# Allegro board Voltmeter.brd
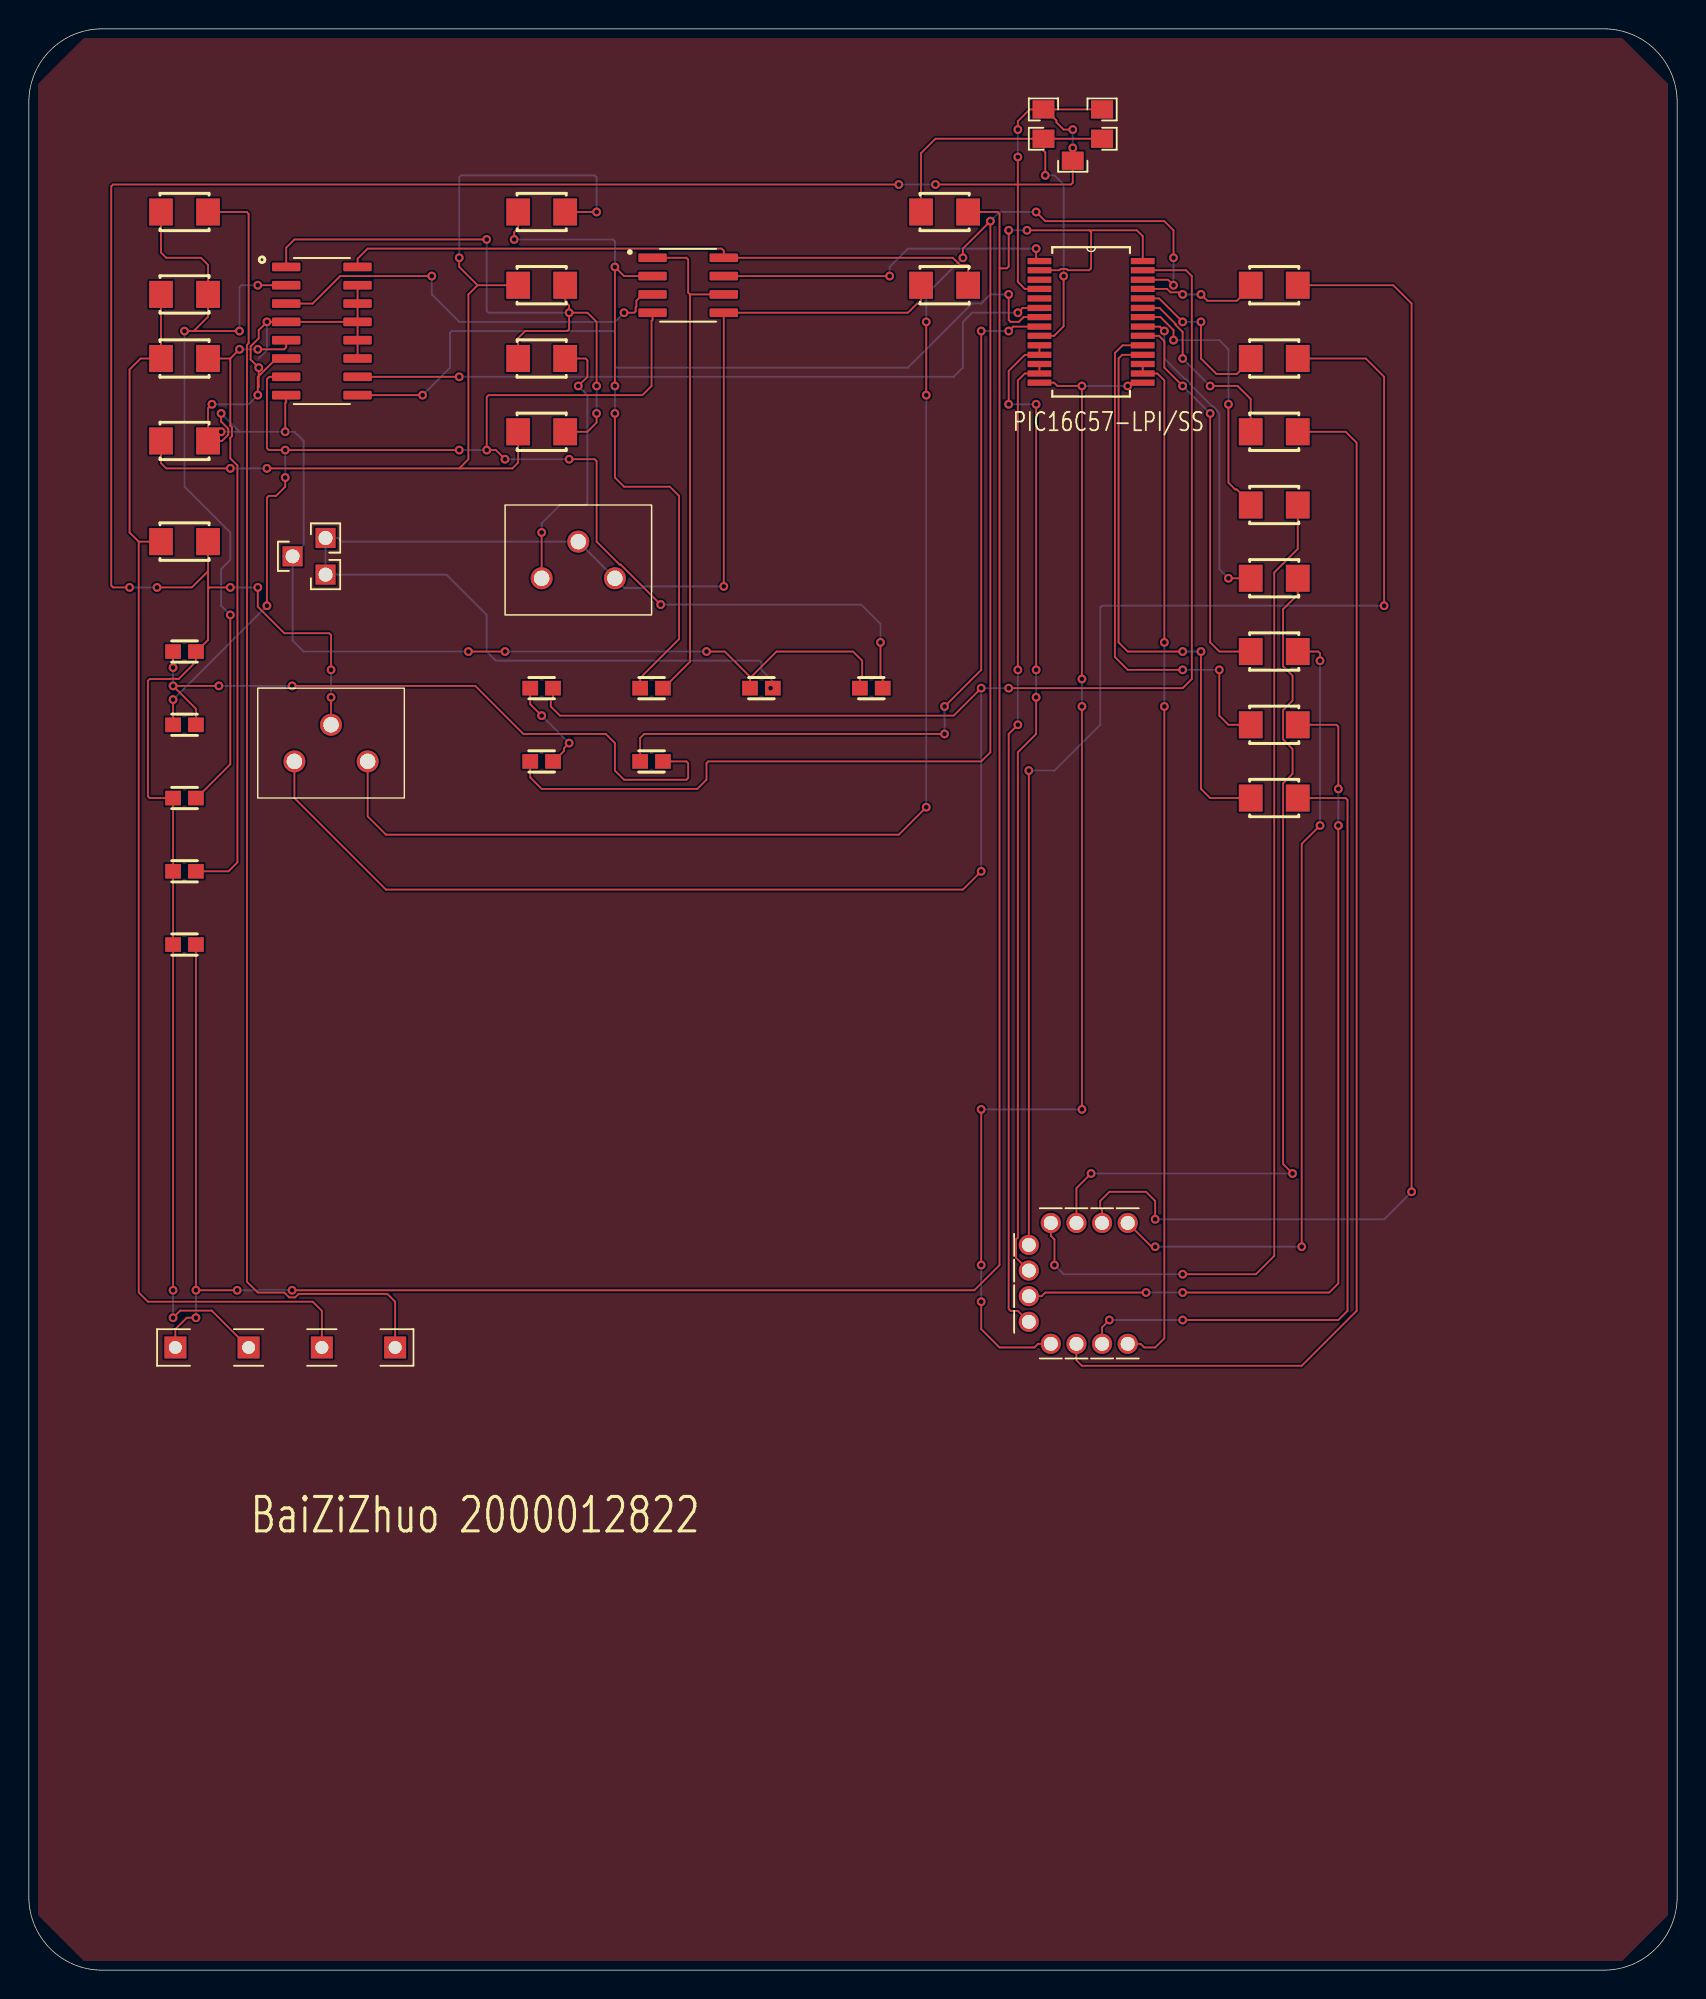
[diagram p0: board, top side]
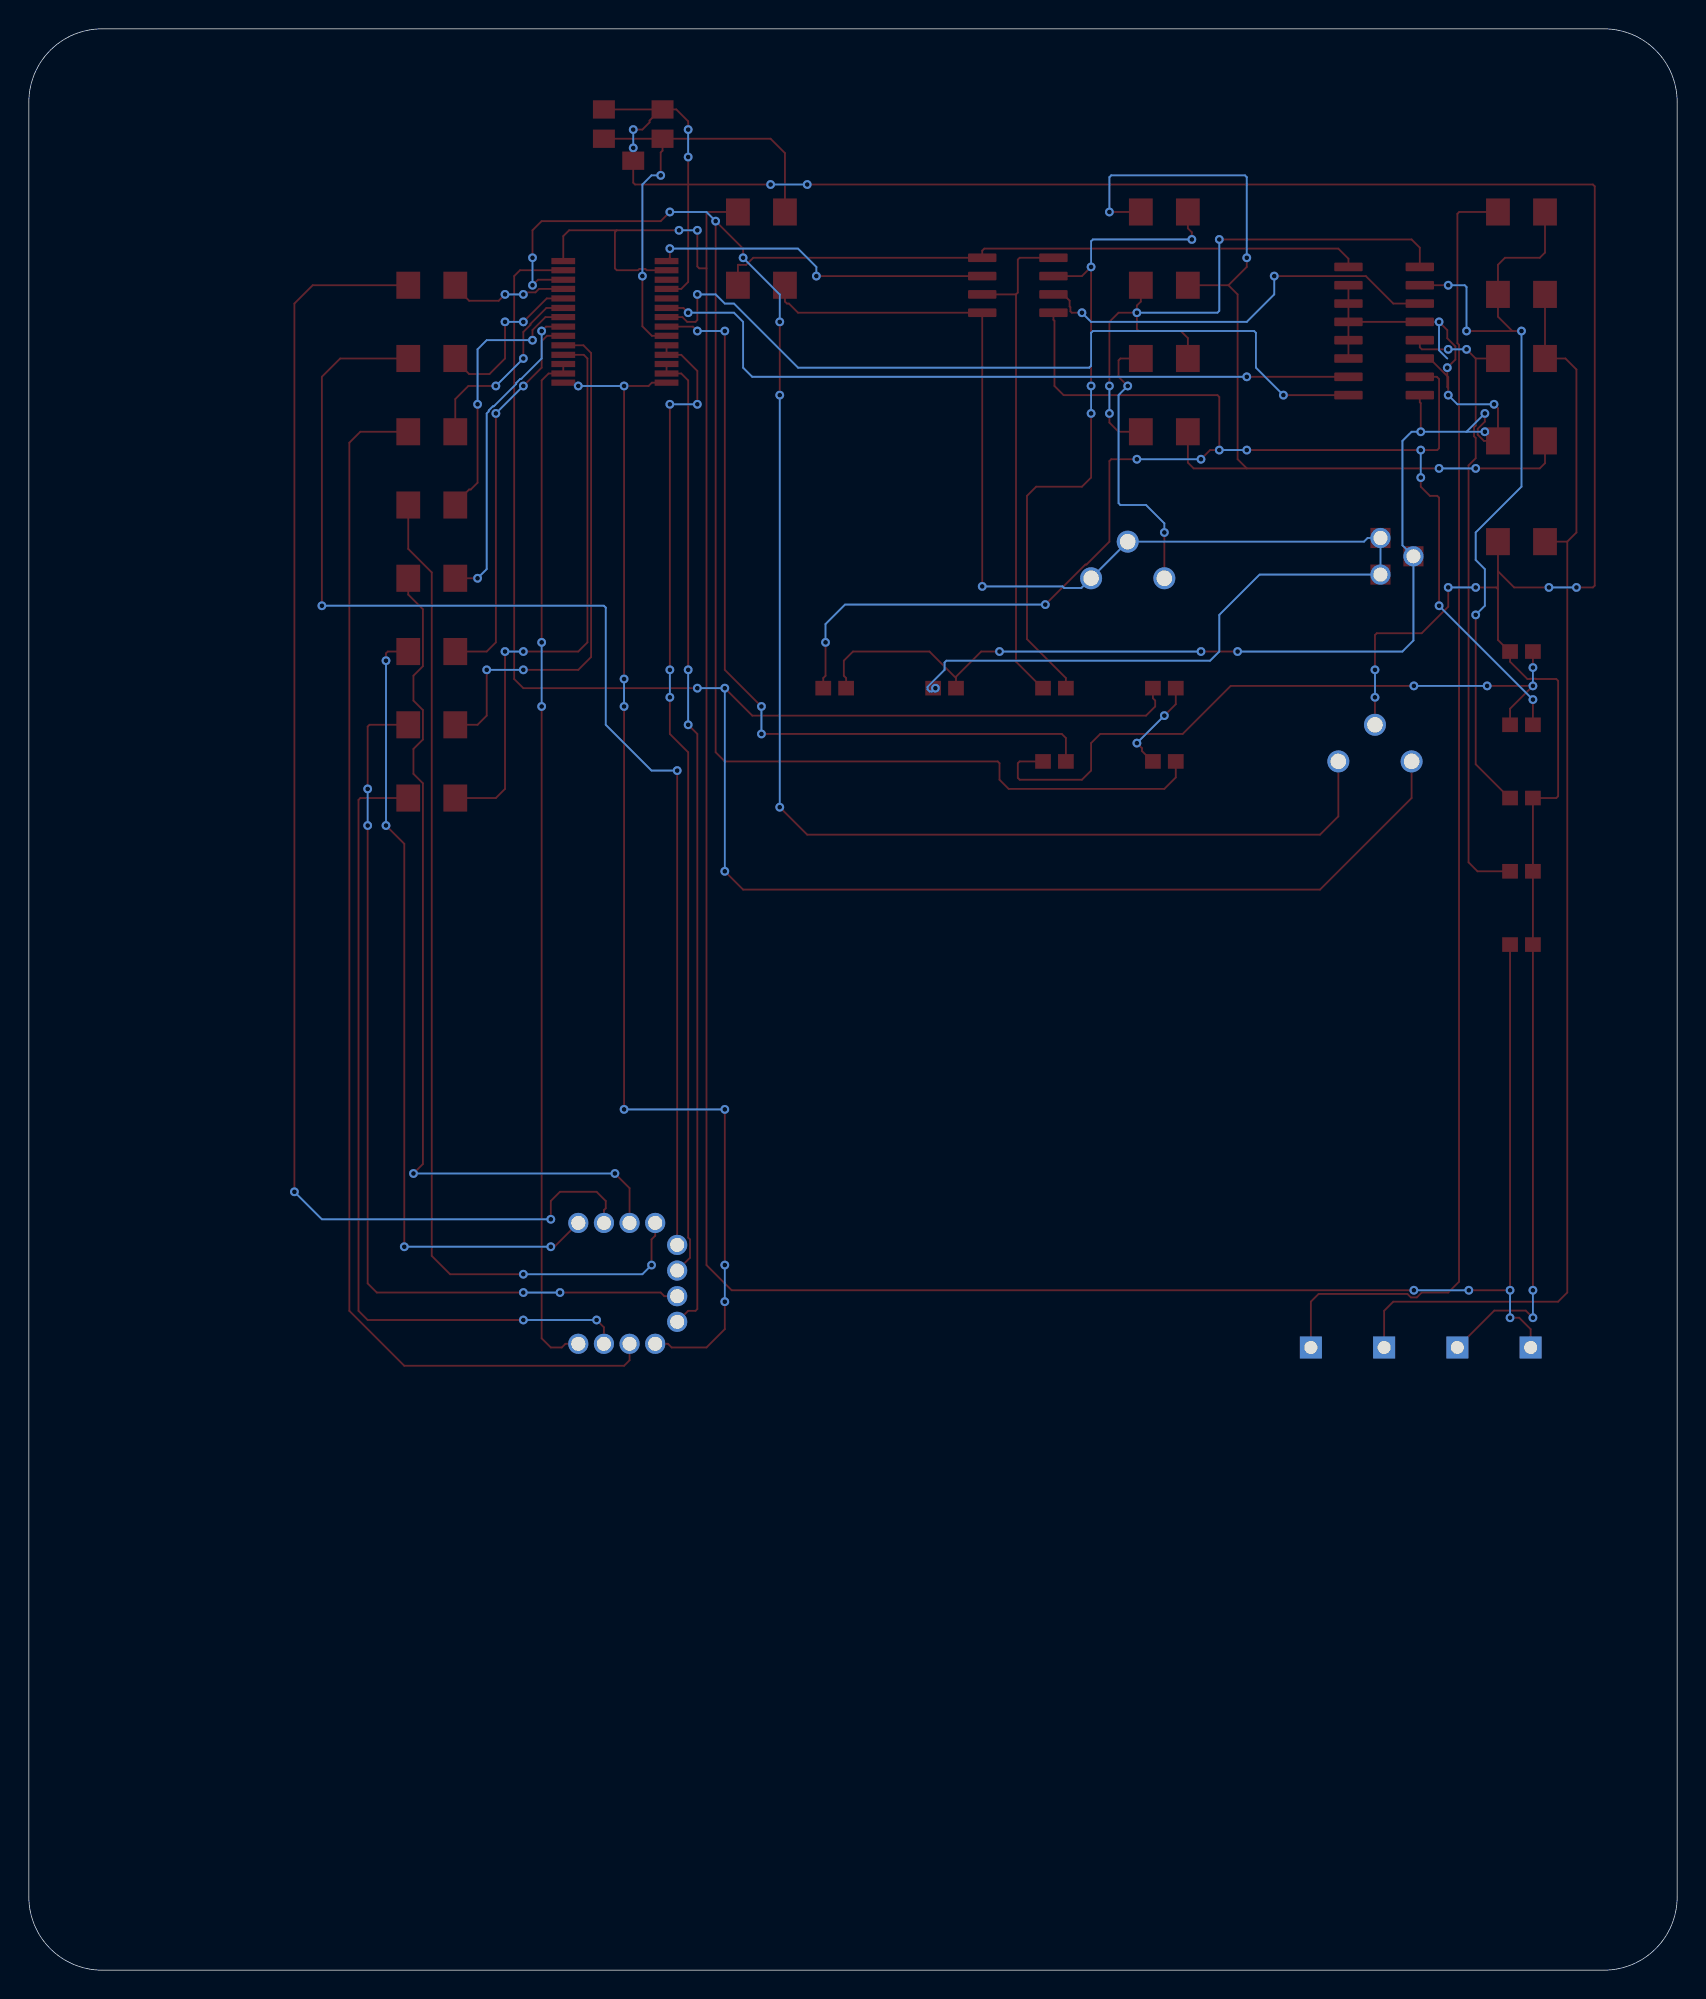
[diagram p1: board, bottom side, seen from below]

Outline 114.3 x 134.62 mm; copper layers: TOP, BOTTOM. Coordinates in mm from the lower left corner of the outline.
Outline path: 0,129.54 0,5.08 arc(1.49,1.49) 5.08,0 109.22,0 arc(112.81,1.49) 114.3,5.08 114.3,129.54 arc(112.81,133.13) 109.22,134.62 5.08,134.62 arc(1.49,133.13) 0,129.54

## Design rules (mm)
constraint set DEFAULT: min track width 0.127

## Placement (name value [footprint] x y rotation side)
C1  4.7uF  [ZS_C0603]  43.18 83.82 0 top
C2  4.7uF  [ZS_C0603]  58.42 88.9 0 top
C3  1uF  [ZS_C0603]  50.8 88.9 0 top
C4  100n/100V  [ZS_C0603]  43.18 88.9 0 top
C5  22p  [ZS_C0603]  35.56 83.82 0 top
C6  22p  [ZS_C0603]  35.56 88.9 0 top
C7  100n  [ZS_C0603]  10.8 71.12 0 top
C8  100n  [ZS_C0603]  10.8 76.2 0 top
C9  100n  [ZS_C0603]  10.8 81.28 0 top
D1  1N4148  [ZS_C0603]  10.8 86.36 0 top
D2  1N4148  [ZS_C0603]  10.8 91.44 0 top
DS1  LG5641AH  [DS1]  66.04 40.64 0 top
J1  Pow_and_Vin  [J1]  -297.18 -208.28 0 top
R1  1k  [ZS_R1206]  63.5 116.84 0 top
R2  220  [ZS_R1206]  86.36 81.28 0 top
R3  220  [ZS_R1206]  86.36 86.36 0 top
R4  220  [ZS_R1206]  86.36 91.44 0 top
R5  220  [ZS_R1206]  86.36 96.52 0 top
R6  220  [ZS_R1206]  86.36 101.6 0 top
R7  220  [ZS_R1206]  86.36 106.68 0 top
R8  220  [ZS_R1206]  86.36 111.76 0 top
R9  220  [ZS_R1206]  86.36 116.84 0 top
R10  100  [POT]  35.56 96.52 0 top
R11  5.1k  [ZS_R1206]  35.56 106.68 0 top
R12  2.7k  [ZS_R1206]  35.56 111.76 0 top
R13  30k  [ZS_R1206]  35.56 121.92 0 top
R14  300  [ZS_R1206]  35.56 116.84 0 top
R15  300  [ZS_R1206]  10.8 106.04 0 top
R16  10k  [ZS_R1206]  10.8 111.76 0 top
R17  100k  [ZS_R1206]  10.8 121.92 0 top
R18  0ohm  [ZS_R1206]  10.8 99.06 0 top
R19  10k  [ZS_R1206]  63.5 121.92 0 top
R20  11k  [ZS_R1206]  10.8 116.21 0 top
S1  Stop/Run  [SW]  63.5 119.38 0 top
U1  TL431  [U1]  12.7 91.44 0 top
U2  TL062  [SOIC127P599X175-8N]  45.72 116.84 0 top
U3  PIC16C57  [SOP65P785X198-28N]  73.66 114.3 0 top
U4  CD4052B  [SOIC127P600X175-16N]  20.32 113.66 0 top
Y1  16MHz  [POT]  18.41 83.82 0 top

## Library data of the parts
C1-C9 = C
D1 D2 = D1N4148
DS1 = LG5641AH
J1 = INPUT
R1-R9 R11-R20 = R
R10 = POT: User Part Number: ***
S1 = Switch Pushbutton TH
U1 = TL431
U2 = TL062
U3 = PIC16C57
U4 = CD4052B/SO
Y1 = XTAL16M: User Part Number: ***

## Footprints (pads in the part's own frame, mm; a bottom-side part is the same pattern mirrored in y, then rotated)
DS1
  round 1.397 hole 0.965: 1(4.826,11.176) 2(6.604,11.176) 3(8.382,11.176) 4(10.16,11.176) 5(3.302,9.652) 6(3.302,7.874) 7(3.302,6.096) 8(3.302,4.318) 9(4.826,2.794) 10(6.604,2.794) 11(8.382,2.794) 12(10.16,2.794)
J1
  rect 1.524x1.524 hole 0.889: 1(307.34,251.46) 2(312.42,251.46) 3(317.5,251.46) 4(322.58,251.46)
POT
  round 1.524 hole 1.067: 1(0,0) 2(5.08,0) 3(2.54,2.54)
SOIC127P599X175-8N
  custom 1.971x0.599 smd: 1(-2.469,1.905) 2(-2.469,0.635) 3(-2.469,-0.635) 4(-2.469,-1.905) 5(2.469,-1.905) 6(2.469,-0.635) 7(2.469,0.635) 8(2.469,1.905)
SOIC127P600X175-16N
  custom 1.971x0.599 smd: 1(-2.474,4.445) 2(-2.474,3.175) 3(-2.474,1.905) 4(-2.474,0.635) 5(-2.474,-0.635) 6(-2.474,-1.905) 7(-2.474,-3.175) 8(-2.474,-4.445) 9(2.474,-4.445) 10(2.474,-3.175) 11(2.474,-1.905) 12(2.474,-0.635) 13(2.474,0.635) 14(2.474,1.905) 15(2.474,3.175) 16(2.474,4.445)
SOP65P785X198-28N
  rect 1.651x0.432 smd: 1(-3.581,4.216) 2(-3.581,3.581) 3(-3.581,2.921) 4(-3.581,2.286) 5(-3.581,1.626) 6(-3.581,0.965) 7(-3.581,0.33) 8(-3.581,-0.33) 9(-3.581,-0.965) 10(-3.581,-1.626) 11(-3.581,-2.286) 12(-3.581,-2.921) 13(-3.581,-3.581) 14(-3.581,-4.216) 15(3.581,-4.216) 16(3.581,-3.581) 17(3.581,-2.921) 18(3.581,-2.286) 19(3.581,-1.626) 20(3.581,-0.965) 21(3.581,-0.33) 22(3.581,0.33) 23(3.581,0.965) 24(3.581,1.626) 25(3.581,2.286) 26(3.581,2.921) 27(3.581,3.581) 28(3.581,4.216)
SW
  rect 1.524x1.27 smd: 1A(6.858,9.652) 1B(6.858,7.62) 2A(10.922,9.652) 2B(10.922,7.62) 3(8.89,6.096)
U1
  rect 1.397x1.397 hole 0.965: 1(7.874,7.874) 6(5.588,6.604) 8(7.874,5.334)
ZS_C0603
  rect 1.092x1.016 smd: 1(-0.792,0) 2(0.792,0)
ZS_R1206
  rect 1.651x1.88 smd: 1(-1.631,0) 2(1.631,0)

## Nets
AGND: C2.1 C3.1 R15.2 U1.6 U4.4(Y3) U4.6 U4.8 U4.11 U4.12 U4.13 U4.14 U4.15
GND: C7.1 C8.1 C9.1 D2.2 J1.2 R18.2 S1.1A S1.2A S1.3(VSS) U3.4 Y1.3(GND)
GND_SIGNAL: J1.3 R16.1 R18.1 R20.1
BIT0: DS1.6 U3.10 U3.11
BIT1: DS1.8 U3.12 U3.13
BIT2: DS1.9 U3.14 U3.15
BIT3: DS1.12 U3.16 U3.17
LED_A: R2.1 U3.18
LED_B: R3.1 U3.19
LED_C: R4.1 U3.20
LED_D: R5.1 U3.21
LED_DP: R9.1 U3.25
LED_E: R6.1 U3.22
LED_F: R7.1 U3.23
LED_G: R8.1 U3.24
OSC_VEE: C1.1 U3.8
SET0: U3.6 U4.10
SET1: U3.7 U4.9
STOP/RUN: R19.1 S1.1B S1.2B U3.9
T0: U2.7(OUT) U3.1
V+5V: C7.2 J1.1 R19.2 U3.2(VDD) U3.28
V+5VA: R1.2 U2.8 U4.16
V-3VA: C2.2 D1.1 U2.4 U4.7
VREF(+2.5V): C3.2 R1.1 R10.2(WIPER) R10.3 U1.1 U1.8(REF) U2.5
Y: U2.3 U4.3
Y0: R11.2 R12.1 R14.2 U4.1
Y1: C8.2 R16.2 U4.5
Y2: C9.2 R17.1 R20.2 U4.2
N10956272: C4.2 U2.1 U2.6
N10956330: C4.1 R13.1 U2.2
N10959149: C1.2 D1.2 D2.1
N10973551: C6.2 U3.27 Y1.1
N10973559: C5.1 U3.26 Y1.2
N10978471: R11.1 R13.2 R14.1 R15.1
N10980547: DS1.11 R2.2
N10980595: DS1.7 R3.2
N10980645: DS1.4 R4.2
N10980695: DS1.2 R5.2
N10980745: DS1.1 R6.2
N10980795: DS1.10(G) R7.2
N10980845: DS1.5 R8.2
N10980895: DS1.3 R9.2
N12685725: J1.4(VIN) R17.2
N109570060: R10.1 R12.2
N109735831: C5.2 C6.1

Pads without a net: U3 3 5

## Via types
v1: diameter 0.61, hole 0.33, TOP to BOTTOM, 143 vias

## Routing (per net, layer and track width the routed paths; a pad name or vN(x,y) marks a point on that pad's centre or on a via; arc(x,y) is an arc through that point)
AGND: length 101.7
  TOP w0.127: U4.13 U4.12 U4.11 ; U4.13 U4.4 v1(16.51,114.3) 15.94,113.73 15.94,113.16 15.38,112.6 15.38,111.69 v1(15.94,111.13) 15.94,109.78 15.88,109.72 ; U4.13 U4.14 U4.15 ; U4.6 17.16,111.76 15.88,110.47 15.88,109.72 ; v1(46.99,91.44) 48.26,91.44 50.01,89.69 50.01,89.6 ; v1(17.78,106.68) 17.78,108.66 17.85,108.73 U4.8 ; v1(13.33,107.95) 13.33,107.38 13.83,106.89 13.83,106.47 13.4,106.04 R15.2 ; v1(12.7,108.59) 12.43,108.31 12.43,106.68 v1(13.33,106.68) ; 50.01,89.6 C3.1 ; 50.01,89.6 51.85,91.44 57.15,91.44 57.78,90.81 57.78,89.76 57.63,89.6 C2.1 ; 15.88,109.72 v1(15.88,109.22) ; v1(33.02,91.44) v1(30.48,91.44)
  BOTTOM w0.127: v1(12.7,108.59) 15.24,108.59 v1(15.88,109.22) ; 14.6,106.68 v1(17.78,106.68) 18.41,106.68 19.05,106.04 19.05,98.81 U1.6 18.29,92.2 19.05,91.44 v1(30.48,91.44) ; 14.6,106.68 v1(13.33,106.68) ; 14.6,106.68 v1(13.33,107.95) ; 15.94,111.76 16.51,112.33 v1(16.51,114.3) ; v1(46.99,91.44) v1(33.02,91.44)
GND: length 208.8
  TOP w0.127: v1(62.87,123.83) 72.26,123.83 72.39,123.95 S1.3 v1(72.39,126.37) ; v1(10,47.15) C7.1 C8.1 C9.1 8.38,81.28 8.25,81.41 8.25,89.41 8.38,89.53 9.78,89.53 9.8,89.55 10.21,89.55 10.23,89.53 10.38,89.53 11.59,90.74 D2.2 11.63,91.44 12.43,92.24 12.43,95.76 ; 70.49,129.03 S1.2A ; 70.49,129.03 71.26,128.26 71.26,128.13 71.75,127.64 v1(72.39,127.64) ; 70.49,129.03 S1.1A 69.4,129.03 68.58,128.21 v1(68.58,127.64) ; v1(13.97,95.89) 12.55,95.89 12.43,95.76 ; v1(6.99,95.89) 5.84,95.89 5.71,96.01 5.71,123.7 5.84,123.83 v1(60.32,123.83) ; 12.43,97.01 11.3,95.89 v1(8.89,95.89) ; 12.43,97.01 R18.2 ; 12.43,97.01 12.43,95.76 ; v1(10,45.24) 10.5,45.74 12.68,45.74 J1.2 ; v1(20.95,90.17) 20.95,92.58 20.83,92.71 17.71,92.71 15.88,94.55 v1(15.88,95.89) ; Y1.3 v1(20.95,88.27) ; v1(68.58,125.73) 68.58,117.07 69.06,116.59 U3.4
  BOTTOM w0.127: v1(15.88,95.89) v1(13.97,95.89) ; v1(62.87,123.83) v1(60.32,123.83) ; v1(10,47.15) v1(10,45.24) ; v1(68.58,127.64) v1(68.58,125.73) ; v1(72.39,126.37) v1(72.39,127.64) ; v1(20.95,88.27) v1(20.95,90.17) ; v1(6.99,95.89) v1(8.89,95.89)
GND_SIGNAL: length 88.5
  TOP w0.127: R20.1 R16.1 7.75,111.76 6.99,111 6.99,99.7 7.62,99.06 ; 7.62,99.06 7.62,46.99 8.25,46.35 19.69,46.35 20.32,45.72 J1.3 ; 7.62,99.06 R18.1
BIT0: length 68.5
  TOP w0.127: v1(69.85,88.27) 69.85,85.72 68.58,84.46 68.58,50.8 68.45,50.67 68.45,49.4 DS1.6 ; v1(67.94,108.59) 67.94,110.9 69.06,112.01 U3.11 U3.10 ; v1(69.85,90.17) v1(69.85,108.59)
  BOTTOM w0.127: v1(69.85,108.59) v1(67.94,108.59) ; v1(69.85,88.27) v1(69.85,90.17)
BIT1: length 68.8
  TOP w0.127: v1(68.58,86.36) 67.94,85.72 67.94,45.85 68.07,45.72 68.58,45.72 DS1.8 ; v1(68.58,90.17) 68.58,110.24 69.06,110.72 U3.13 U3.12
  BOTTOM w0.127: v1(68.58,90.17) v1(68.58,86.36)
BIT2: length 85.2
  TOP w0.127: U3.15 76.43,110.08 v1(76.2,109.85) ; v1(66.04,46.35) 66.04,44.45 67.31,43.18 69.72,43.18 69.98,43.43 DS1.9 ; U3.14 71.1,110.08 71.33,109.85 v1(73.02,109.85) v1(73.02,89.53) ; v1(73.02,87.63) v1(73.02,59.69) ; v1(66.04,59.69) v1(66.04,48.9)
  BOTTOM w0.127: v1(73.02,59.69) v1(66.04,59.69) ; v1(76.2,109.85) v1(73.02,109.85) ; v1(66.04,48.9) v1(66.04,46.35) ; v1(73.02,89.53) v1(73.02,87.63)
BIT3: length 71.7
  TOP w0.127: v1(78.74,87.63) 78.74,43.82 78.1,43.18 77.34,43.18 77.09,43.43 DS1.12 ; v1(78.74,92.08) 78.74,110.24 78.26,110.72 U3.16 U3.17
  BOTTOM w0.127: v1(78.74,92.08) v1(78.74,87.63)
LED_A: length 40.7
  TOP w0.127: U3.18 75.82,112.01 75.56,111.76 75.56,92.08 76.2,91.44 v1(80.01,91.44) ; v1(81.28,91.44) 81.28,81.91 81.91,81.28 R2.1
  BOTTOM w0.127: v1(80.01,91.44) v1(81.28,91.44)
LED_B: length 36.5
  TOP w0.127: v1(80.01,90.17) 76.2,90.17 75.31,91.06 75.31,112.14 75.84,112.67 U3.19 ; R3.1 83.19,86.36 82.55,87 v1(82.55,90.17)
  BOTTOM w0.127: v1(80.01,90.17) v1(82.55,90.17)
LED_C: length 26.9
  TOP w0.127: R4.1 82.55,91.44 81.91,92.08 v1(81.91,107.95) ; U3.20 78.37,113.33 78.74,112.96 78.74,111.13 v1(80.01,109.85)
  BOTTOM w0.127: v1(80.01,109.85) v1(81.91,107.95)
LED_D: length 22.2
  TOP w0.127: v1(83.19,96.52) R5.1 ; v1(78.74,113.66) 78.44,113.97 U3.21
  BOTTOM w0.127: v1(83.19,96.52) 82.55,97.16 82.55,107.95 82.41,108.09 82.41,108.16 82.12,108.45 82.05,108.45 80.51,109.99 80.51,110.06 80.22,110.35 80.15,110.35 78.74,111.76 v1(78.74,113.66)
LED_DP: length 8.3
  TOP w0.127: v1(80.01,116.21) 79.87,116.34 79.17,116.34 78.93,116.59 U3.25 ; v1(81.28,116.21) 81.72,115.76 83.77,115.76 84.73,116.73 R9.1
  BOTTOM w0.127: v1(80.01,116.21) v1(81.28,116.21)
LED_E: length 18.8
  TOP w0.127: v1(83.19,108.59) 83.19,103.14 83.65,102.68 83.77,102.68 84.73,101.71 R6.1 ; v1(79.38,113.03) 79.38,113.73 78.48,114.63 U3.22
  BOTTOM w0.127: v1(79.38,113.03) 82.55,113.03 83.19,112.4 v1(83.19,108.59)
LED_F: length 13.5
  TOP w0.127: v1(80.01,111.76) 80.01,113.6 79.51,114.09 79.51,114.16 78.41,115.27 U3.23 ; R7.1 84.73,108.95 83.82,109.85 v1(81.91,109.85)
  BOTTOM w0.127: v1(80.01,111.76) v1(81.91,109.85)
LED_G: length 11.7
  TOP w0.127: v1(81.28,114.3) 81.28,111.76 82.36,110.68 83.77,110.68 84.73,111.65 R8.1 ; U3.24 78.38,115.93 v1(80.01,114.3)
  BOTTOM w0.127: v1(80.01,114.3) v1(81.28,114.3)
OSC_VEE: length 56
  TOP w0.127: v1(66.04,113.66) 66.04,90.17 v1(63.5,87.63) ; v1(67.94,113.66) 68.25,113.97 U3.8 ; v1(63.5,85.72) 42.67,85.72 42.39,85.44 C1.1
  BOTTOM w0.127: v1(63.5,87.63) v1(63.5,85.72) ; v1(67.94,113.66) v1(66.04,113.66)
SET0: length 51.1
  TOP w0.127: v1(68.58,114.94) 68.91,115.27 U3.6 ; U4.10 v1(29.84,110.49)
  BOTTOM w0.127: v1(68.58,114.94) 65.4,114.94 64.77,114.3 64.77,111.13 64.13,110.49 v1(29.84,110.49)
SET1: length 57
  TOP w0.127: v1(27.31,109.22) U4.9 ; v1(67.94,116.21) 67.94,114.43 68.07,114.3 68.65,114.3 68.98,114.63 U3.7
  BOTTOM w0.127: v1(67.94,116.21) 66.68,116.21 66.04,115.57 65.4,115.57 60.96,111.13 40.77,111.13 40.64,111.25 40.64,113.54 40.51,113.66 29.34,113.66 29.21,113.54 29.21,111.13 v1(27.31,109.22)
STOP/RUN: length 33
  TOP w0.127: S1.1B 62.87,127 61.87,126 R19.1 ; S1.1B 70.36,126.17 70.49,126.04 v1(70.49,124.46) ; S1.1B S1.2B ; v1(71.75,117.47) 71.75,113.99 71.1,113.33 U3.9
  BOTTOM w0.127: v1(71.75,117.47) 71.75,123.83 71.12,124.46 v1(70.49,124.46)
T0: length 23.8
  TOP w0.127: U2.7 v1(59.69,117.47) ; v1(69.85,119.38) 69.85,118.75 U3.1
  BOTTOM w0.127: v1(59.69,117.47) 59.69,118.11 60.96,119.38 v1(69.85,119.38)
V+5V: length 181.3
  TOP w0.127: v1(11.59,45.24) 10.95,45.24 10.16,44.45 J1.1 ; U3.2 71.46,117.88 71.55,117.97 71.96,117.97 72.05,117.88 73.53,117.88 73.66,118.01 73.66,120.52 73.53,120.65 ; C7.2 v1(11.59,47.15) v1(14.45,47.15) ; v1(67.94,120.65) 67.94,118.14 67.82,118.01 67.31,118.01 ; 73.53,120.65 76.83,120.65 77.24,120.24 U3.28 ; 73.53,120.65 v1(69.21,120.65) ; 67.31,118.01 67.31,121.79 67.18,121.92 R19.2 ; 67.31,118.01 67.31,48.9 65.56,47.15 v1(18.26,47.15)
  BOTTOM w0.127: v1(11.59,47.15) v1(11.59,45.24) ; v1(14.45,47.15) v1(18.26,47.15) ; v1(67.94,120.65) v1(69.21,120.65)
V+5VA: length 45.4
  TOP w0.127: R1.2 65.13,118.26 64.98,118.26 64.98,118.25 64.56,118.25 64.07,118.75 U2.8 48.19,119.24 48.05,119.38 23.5,119.38 22.79,118.68 U4.16
V-3VA: length 104.7
  TOP w0.127: v1(59.06,92.08) 59.06,89.76 59.21,89.6 C2.2 ; v1(37.46,104.78) 39.24,104.78 39.37,104.65 39.37,99.06 40.96,97.47 41.04,97.47 v1(43.81,94.69) ; v1(33.02,104.78) 32.38,105.41 v1(31.75,105.41) 31.75,109.09 31.88,109.22 42.55,109.22 43.18,109.85 43.18,114.37 43.25,114.44 U2.4 ; D1.1 v1(10,88.11) ; v1(16.51,94.62) 16.51,102.11 16.64,102.23 17.14,102.23 17.78,102.87 v1(17.78,103.51) ; v1(29.84,105.41) v1(17.78,105.41) 16.64,105.41 16.51,105.54 16.51,110.33 16.67,110.49 U4.7
  BOTTOM w0.127: v1(43.81,94.69) 57.71,94.69 59.06,93.34 v1(59.06,92.08) ; v1(17.78,103.51) v1(17.78,105.41) ; v1(33.02,104.78) v1(37.46,104.78) ; v1(10,88.11) v1(16.51,94.62) ; v1(29.84,105.41) v1(31.75,105.41)
VREF(+2.5V): length 103
  TOP w0.127: R1.1 61.87,115.71 61.73,115.57 61.59,115.57 60.96,114.94 U2.5 v1(48.19,95.96)
  BOTTOM w0.127: v1(48.19,95.96) 42.62,95.96 42.5,95.84 41.32,95.84 R10.2 R10.3 21.72,99.06 21.46,99.31 U1.1 U1.8 28.96,96.77 31.75,93.98 31.75,91.44 32.38,90.81 50.67,90.81 50.8,90.68 50.8,90.17 51.98,88.99 51.98,88.81 51.84,88.67 51.66,88.67 v1(51.44,88.9)
Y: length 29.4
  TOP w0.127: v1(27.94,117.47) 21.59,117.47 19.69,115.57 U4.3 ; U2.3 42.57,116.21 42.13,115.77 42.13,115.37 42.08,115.32 42.08,115.03 41.98,114.94 v1(41.27,114.94)
  BOTTOM w0.127: v1(41.27,114.94) 40.64,114.3 29.84,114.3 27.94,116.21 v1(27.94,117.47)
Y0: length 46.2
  TOP w0.127: U4.1 17.85,119.45 18.41,120.02 v1(31.75,120.02) ; v1(37.46,114.94) 37.46,113.79 37.34,113.66 34.42,113.66 33.93,113.18 R12.1 ; v1(37.46,114.94) 37.46,115.43 37.19,115.71 R14.2 ; v1(37.46,114.94) 38.74,114.94 39.37,114.3 v1(39.37,109.85) ; v1(39.37,107.95) 39.37,107.32 38.74,106.68 R11.2
  BOTTOM w0.127: v1(37.46,114.94) 31.88,114.94 31.75,115.06 v1(31.75,120.02) ; v1(39.37,109.85) v1(39.37,107.95)
Y1: length 44.6
  TOP w0.127: 13.97,111.76 13.97,107.11 14.08,106.99 14.08,106.37 13.97,106.25 13.97,104.84 14.47,104.35 14.47,76.82 13.84,76.2 C8.2 ; 13.97,111.76 R16.2 ; 13.97,111.76 v1(14.6,112.4) ; U4.5 17.85,112.54 17.7,112.4 v1(15.88,112.4)
  BOTTOM w0.127: v1(14.6,112.4) v1(15.88,112.4)
Y2: length 56.8
  TOP w0.127: 11.43,113.66 v1(10.8,113.66) ; 11.43,113.66 12.43,114.66 R20.2 12.43,118.26 11.94,118.75 9.52,118.75 9.16,119.11 R17.1 ; 11.43,113.66 v1(14.6,113.66) ; U4.2 v1(15.88,116.84) ; v1(13.97,93.98) 13.97,83.62 11.63,81.28 C9.2
  BOTTOM w0.127: v1(13.97,93.98) 13.33,94.62 13.33,97.16 13.97,97.79 13.97,99.7 10.8,102.87 v1(10.8,113.66) ; v1(15.88,116.84) 14.73,116.84 14.6,116.71 v1(14.6,113.66)
N10956272: length 35.4
  TOP w0.127: 45.85,116.21 45.72,116.33 45.72,118.62 45.59,118.75 U2.1 ; 45.85,116.21 45.85,90.74 44.01,88.9 C4.2 ; 45.85,116.21 U2.6
N10956330: length 47.7
  TOP w0.127: U2.2 41.27,117.47 v1(40.64,118.11) v1(40.64,109.85) ; v1(40.64,107.95) 40.64,103.51 41.27,102.87 44.45,102.87 45.08,102.23 45.08,92.3 42.39,89.6 C4.1 ; v1(33.65,120.02) 33.65,120.51 33.93,120.79 R13.1
  BOTTOM w0.127: v1(40.64,118.11) 40.64,119.89 40.51,120.02 v1(33.65,120.02) ; v1(40.64,109.85) v1(40.64,107.95)
N10959149: length 48.1
  TOP w0.127: C1.2 45.59,83.82 45.72,83.69 45.72,82.68 45.59,82.55 41.27,82.55 40.64,83.19 40.64,85.09 40,85.72 34.29,85.72 30.96,89.06 v1(18.26,89.06) ; D1.2 11.59,87.47 v1(10,89.06) v1(13.18,89.06) ; D2.1 v1(10,90.33)
  BOTTOM w0.127: v1(13.18,89.06) v1(18.26,89.06) ; v1(10,90.33) v1(10,89.06)
N10973551: length 144.6
  TOP w0.127: U3.27 80.24,117.88 80.64,117.47 80.64,89.53 80.01,88.9 v1(67.94,88.9) ; C6.2 36.35,88.2 36.19,88.04 36.19,87.63 36.83,87 64.13,87 v1(66.04,88.9) ; v1(66.04,76.2) 64.77,74.93 24.76,74.93 18.41,81.28 Y1.1
  BOTTOM w0.127: v1(67.94,88.9) v1(66.04,88.9) v1(66.04,76.2)
N10973559: length 177.8
  TOP w0.127: v1(79.38,118.75) 79.38,120.65 78.74,121.28 70.49,121.28 v1(69.85,121.92) ; v1(79.38,116.84) 78.99,117.22 U3.26 ; C5.1 34.77,82.71 35.56,81.91 46.35,81.91 46.99,82.55 46.99,83.69 47.12,83.82 66.04,83.82 66.68,84.46 v1(66.68,121.28) 64.77,119.38 v1(64.77,118.75) ; 23.5,83.82 23.5,80.01 24.76,78.74 60.32,78.74 v1(62.23,80.65) ; v1(62.23,109.22) v1(62.23,114.3)
  BOTTOM w0.127: v1(69.85,121.92) 67.31,121.92 v1(66.68,121.28) ; v1(62.23,114.3) 62.23,116.21 v1(64.77,118.75) ; v1(79.38,116.84) v1(79.38,118.75) ; v1(62.23,80.65) v1(62.23,109.22)
N10978471: length 67.7
  TOP w0.127: v1(29.84,118.75) 29.84,118.11 31.12,116.84 ; v1(13.97,104.14) 9.52,104.14 9.16,104.5 R15.1 9.16,106.68 ; R13.2 v1(39.37,121.92) ; v1(16.51,104.14) 29.84,104.14 ; 29.84,104.14 30.48,104.78 30.48,116.21 31.12,116.84 ; 29.84,104.14 33.53,104.14 33.93,104.54 R11.1 ; 31.12,116.84 R14.1
  BOTTOM w0.127: v1(29.84,118.75) 29.84,124.33 29.97,124.46 39.24,124.46 39.37,124.33 v1(39.37,121.92) ; v1(13.97,104.14) v1(16.51,104.14)
N10980547: length 57.6
  TOP w0.127: v1(80.01,45.09) 90.81,45.09 91.44,45.72 91.44,81.15 91.31,81.28 R2.2 ; v1(74.93,45.09) 74.42,44.58 DS1.11
  BOTTOM w0.127: v1(74.93,45.09) v1(80.01,45.09)
N10980595: length 63.3
  TOP w0.127: DS1.7 70.23,46.74 70.49,46.99 v1(77.47,46.99) ; R3.2 90.68,86.36 90.81,86.23 v1(90.81,81.91) ; v1(90.81,79.38) 90.81,47.63 90.17,46.99 v1(80.01,46.99)
  BOTTOM w0.127: v1(80.01,46.99) v1(77.47,46.99) ; v1(90.81,81.91) v1(90.81,79.38)
N10980645: length 56
  TOP w0.127: DS1.4 77.85,50.16 v1(78.1,50.16) ; v1(88.26,50.16) 88.26,78.1 v1(89.53,79.38) ; R4.2 89.41,91.44 89.53,91.31 v1(89.53,90.81)
  BOTTOM w0.127: v1(78.1,50.16) v1(88.26,50.16) ; v1(89.53,79.38) v1(89.53,90.81)
N10980695: length 60.9
  TOP w0.127: v1(87.63,55.25) 86.97,55.9 86.97,82.3 87.63,82.96 87.63,84.68 86.97,85.34 86.97,87.38 87.63,88.04 87.63,89.76 86.97,90.42 86.97,94.37 87.99,95.39 R5.2 ; DS1.2 72.64,54.23 v1(73.66,55.25)
  BOTTOM w0.127: v1(73.66,55.25) v1(87.63,55.25)
N10980745: length 71.8
  TOP w0.127: R6.2 87.99,98.56 86.36,96.93 86.36,49.53 85.09,48.26 v1(80.01,48.26) ; v1(71.12,48.9) 71.12,50.67 70.87,50.93 DS1.1
  BOTTOM w0.127: v1(71.12,48.9) 71.75,48.26 v1(80.01,48.26)
N10980795: length 86.9
  TOP w0.127: DS1.10 72.64,42.29 73.02,41.91 88.26,41.91 92.07,45.72 92.07,105.92 91.31,106.68 R7.2
N10980845: length 89.4
  TOP w0.127: v1(93.98,94.62) 93.98,110.49 92.71,111.76 R8.2 ; DS1.5 v1(69.34,83.19)
  BOTTOM w0.127: v1(93.98,94.62) 74.42,94.62 74.3,94.49 74.3,86.36 71.12,83.19 v1(69.34,83.19)
N10980895: length 95.8
  TOP w0.127: DS1.3 74.42,52.71 74.3,52.83 74.3,53.34 74.93,53.97 77.47,53.97 78.1,53.34 v1(78.1,52.07) ; R9.2 94.62,116.84 95.88,115.57 v1(95.88,53.97)
  BOTTOM w0.127: v1(78.1,52.07) 93.98,52.07 v1(95.88,53.97)
N12685725: length 91.2
  TOP w0.127: R17.2 15.11,121.92 15.24,121.79 15.24,112.82 15.13,112.71 15.13,47.74 15.88,46.99 17.71,46.99 18.05,46.65 18.46,46.65 18.7,46.89 24.86,46.89 25.4,46.35 J1.4
N109570060: length 19.6
  TOP w0.127: R12.2 38.61,111.76 38.74,111.63 38.74,110.49 v1(38.1,109.85) ; v1(35.56,99.7) R10.1
  BOTTOM w0.127: v1(35.56,99.7) 35.56,100.33 36.83,101.6 38.61,101.6 38.74,101.73 38.74,109.22 v1(38.1,109.85)
N109735831: length 6.7
  TOP w0.127: C5.2 36.39,83.82 37.11,84.54 37.11,84.74 v1(37.46,85.09) ; v1(35.56,87) 34.77,87.79 C6.1
  BOTTOM w0.127: v1(35.56,87) v1(37.46,85.09)

## Copper pours and planes (outline as drawn; the poured copper is in the pictures)
Net_1 on TOP: 110.49,133.98 3.81,133.98 0.63,130.81 0.63,3.81 3.81,0.64 110.49,0.64 113.66,3.81 113.66,130.81

## Text on the board
Ref Des/Silkscreen Top: BaiZiZhuo 2000012822
BODY_CENTER: FIGURE | FINISHED_SIZE | 13.0 | 35.0 | 38.0 | 42.0 | DRILL CHART: TOP to BOTTOM | ALL UNITS ARE IN MILS | PLATED | QTY | 143 | 4 | 15 | 6
